# Altium PCB wireTest.PcbDoc (part 2 of 2)
Units mm, origin at the board's own origin, x right, y up, seen from the top; angles counter-clockwise.
Board outline 69.72 x 89.74 mm, 2 copper layers (Top Layer, Bottom Layer); 104 components, 99 nets, 356 pads, 85 vias.
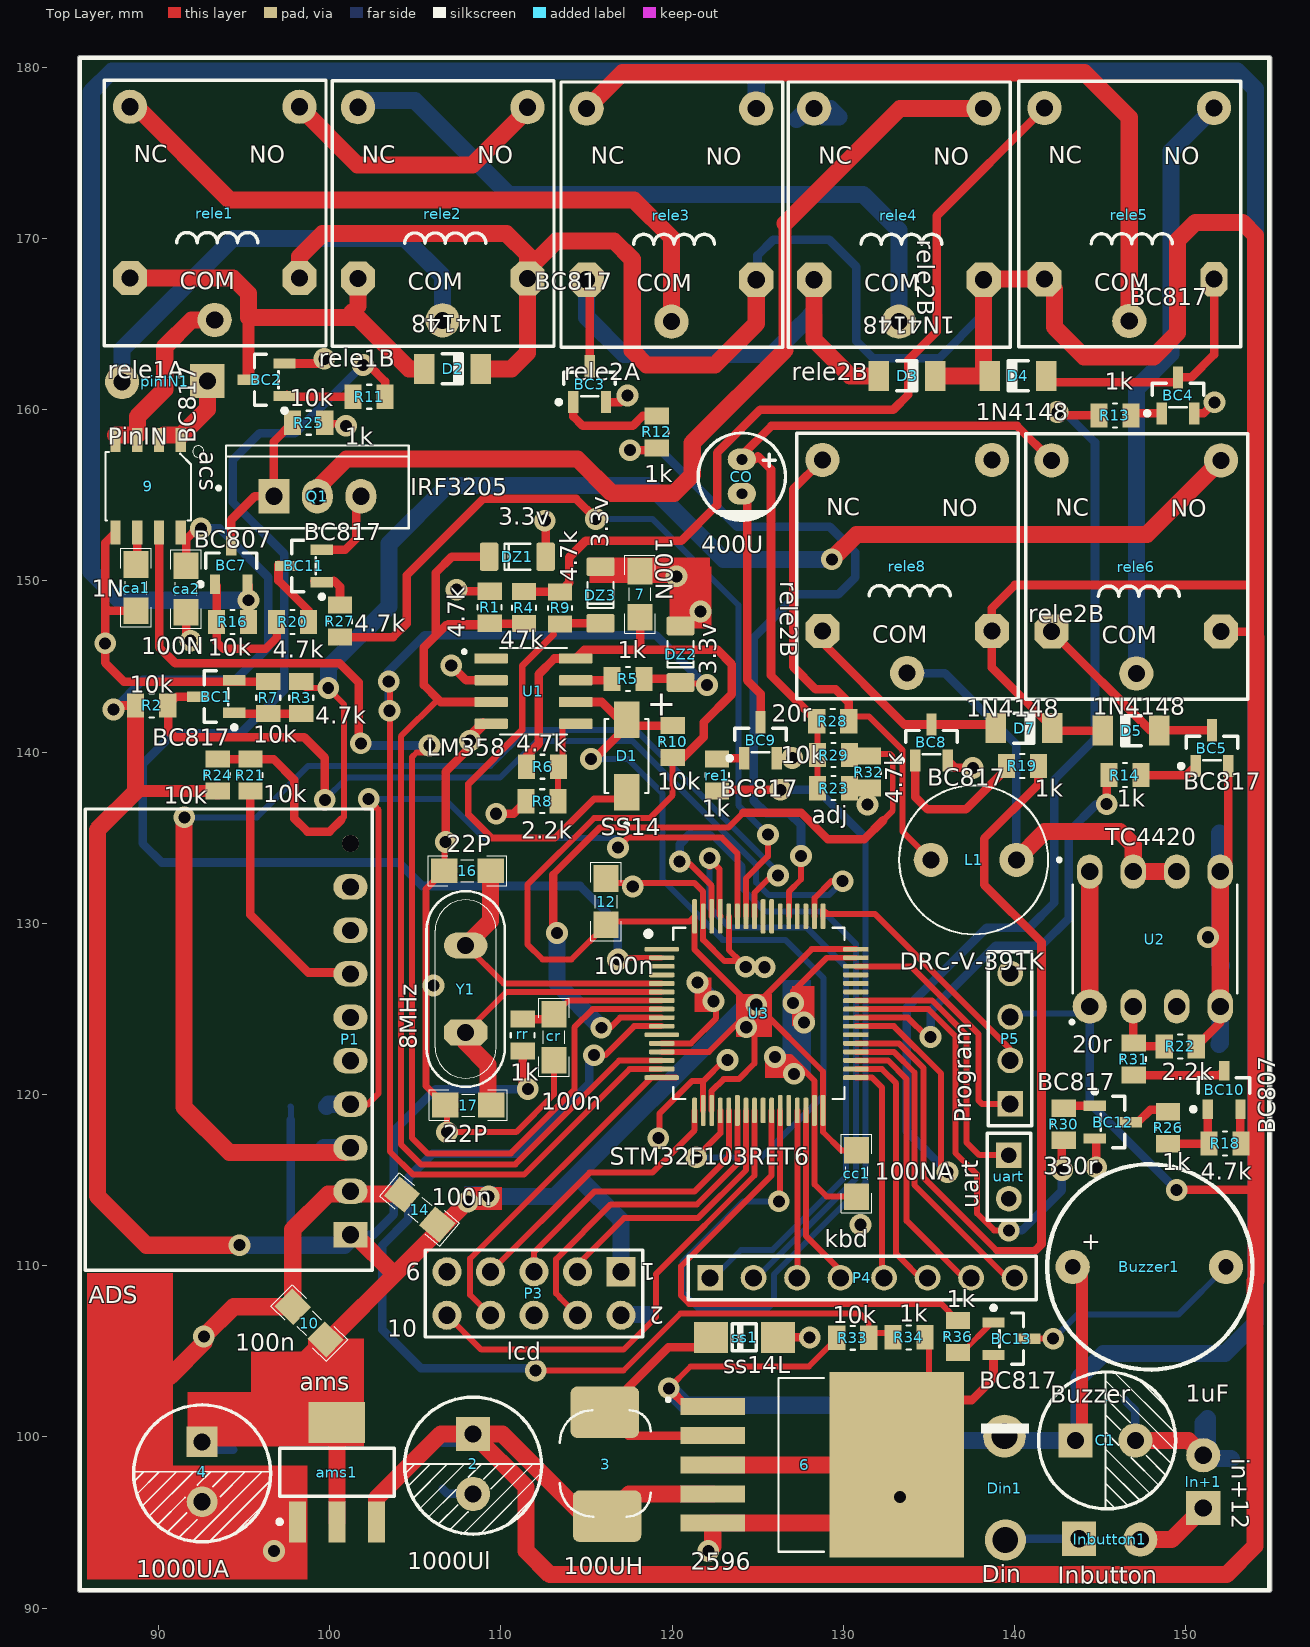
[diagram p0: Top Layer view]

## Via types
v1: diameter 1.27, hole 0.7, Top Layer to Bottom Layer, tented both sides, 54 vias
v2: diameter 1.27, hole 0.711, Top Layer to Bottom Layer, tented both sides, 31 vias

## Nets (pads, with @x,y where several pads share a name; then routed paths per layer and width w, separated by ;. In a path a pad name is that pad's centre, name@x,y a point inside that pad or via, vN(x,y) a via of type N, cw(c..) or ccw(c..) an arc to the next point about the centre after c; other vN are vias at no path point) (continued)
VCC: (continued)
  Bottom Layer w0.35: R37.1 97.744,119.278 97.744,118.516 ; 102.337,111.811 102.565,111.811
  Bottom Layer w0.5: v1(87.376,142.494) 89.103,144.221 94.513,144.221 96.418,146.126 96.418,150.216 93.574,153.06 v1(92.481,153.06) ; 4.1 93.008,99.267 5.2 ; 97.561,111.201 97.744,111.384 R35.1 97.744,118.516 ; P1.1 101.473,111.811 102.337,111.811 ; 102.565,111.811 103.759,113.005 103.759,117.881 106.197,120.32 v1(111.582,120.32)
  Bottom Layer w1: v1(94.742,111.201) 97.561,111.201 100.863,111.201 P1.1@101.473,111.811 ; v1(109.296,114.046) 113.157,114.046 124.358,125.247 v2(124.917,125.247) ; 114.579,115.113 117.018,112.674 P3.1
  other v2: 124.333,123.927
pads on no net: 3.0 DZ1.0 DZ2.0 DZ3.0 P1.5 P1.6 P1.8 P1.9 P1.10 P3.6 P3.9 rele8.3 U1.1 U2.3 U3.1 U3.28 U3.55 U3.56

## Polygon pours and split planes (outlines as drawn)
GND on Bottom Layer "GND_L02_P002" (solid, remove dead copper, pour order 2): 153.543,179.629 153.111,180.061 85.75,180.061 85.75,92.786 87.02,91.516 154.407,91.516 154.407,179.4 154.178,179.629

## Other copper
Top Layer:
  rectangle net GND: 115.189,149.885 122.225,151.359
  rectangle net GND: 119.863,147.218 122.301,150.851
  rectangle net VCC: 107.874,113.259 110.084,114.605
  rectangle net GND: 121.31,124.816 122.301,126.848
  rectangle net GND: 127,124.003 128.321,126.34
  rectangle net GND: 125.425,120.955 127.254,122.149
  rectangle net GND: 90.602,91.669 98.704,98.349
  rectangle net GND: 85.827,91.669 90.856,109.576
  rectangle net VCC: 98.73,99.441 102.006,105.766
  rectangle net VCC: 91.694,99.441 95.402,102.616
  rectangle net VCC: 95.402,99.441 98.781,105.004
  rectangle net VCC: 123.723,123.368 125.832,125.882
Bottom Layer:
  rectangle net VCC: 107.874,113.284 109.652,114.656
  rectangle net GND: 126.467,121.209 128.118,126.695

## Silkscreen, mask and mechanical layers (free items; w line width, h text height)
Top Overlay:
  lines w0.254: 85.42,91.059 85.42,180.543 154.889,180.543 154.889,91.059 85.42,91.059
  text "+" at 118.516,142.113 h1.52
Bottom Overlay:
  text "+" at 107.563,146.228 h1

## Text inside footprints (layer, text, board x,y; h text height)
Buzzer1: Top Overlay "+" at 143.904,110.931 h1
P3: Top Overlay "2" at 119.558,107.62 h1 r180; Top Overlay "1" at 119.05,110.16 h1 r180; Top Overlay "9" at 105.334,110.16 h1 r180; Top Overlay "10" at 103.378,105.867 h1
rele1: Top Overlay "COM" at 91.259,167.019 h1; Top Overlay "NO" at 95.298,174.41 h1; Top Overlay "NC" at 88.567,174.461 h1
rele2: Top Overlay "COM" at 104.575,166.993 h1; Top Overlay "NO" at 108.613,174.385 h1; Top Overlay "NC" at 101.882,174.436 h1
rele3: Top Overlay "COM" at 117.935,166.917 h1; Top Overlay "NO" at 121.974,174.309 h1; Top Overlay "NC" at 115.243,174.359 h1
rele4: Top Overlay "COM" at 131.219,166.917 h1; Top Overlay "NO" at 135.258,174.309 h1; Top Overlay "NC" at 128.527,174.359 h1
rele5: Top Overlay "NC" at 141.983,174.392 h1; Top Overlay "NO" at 148.714,174.342 h1; Top Overlay "COM" at 144.675,166.95 h1
rele6: Top Overlay "NC" at 142.395,153.811 h1; Top Overlay "NO" at 149.126,153.76 h1; Top Overlay "COM" at 145.088,146.369 h1
rele8: Top Overlay "NC" at 129.01,153.836 h1; Top Overlay "NO" at 135.741,153.785 h1; Top Overlay "COM" at 131.702,146.394 h1